# Altium PCB 800U R3N3_LED_V1.1.PcbDoc (part 1 of 2)
Units mm, origin at the board's own origin, x right, y up, seen from the top; angles counter-clockwise.
Board outline 308.48 x 220.22 mm, 4 copper layers (Top Layer, GND, Mid-Layer 2, Bottom Layer); 79 components, 48 nets, 220 pads, 97 vias.
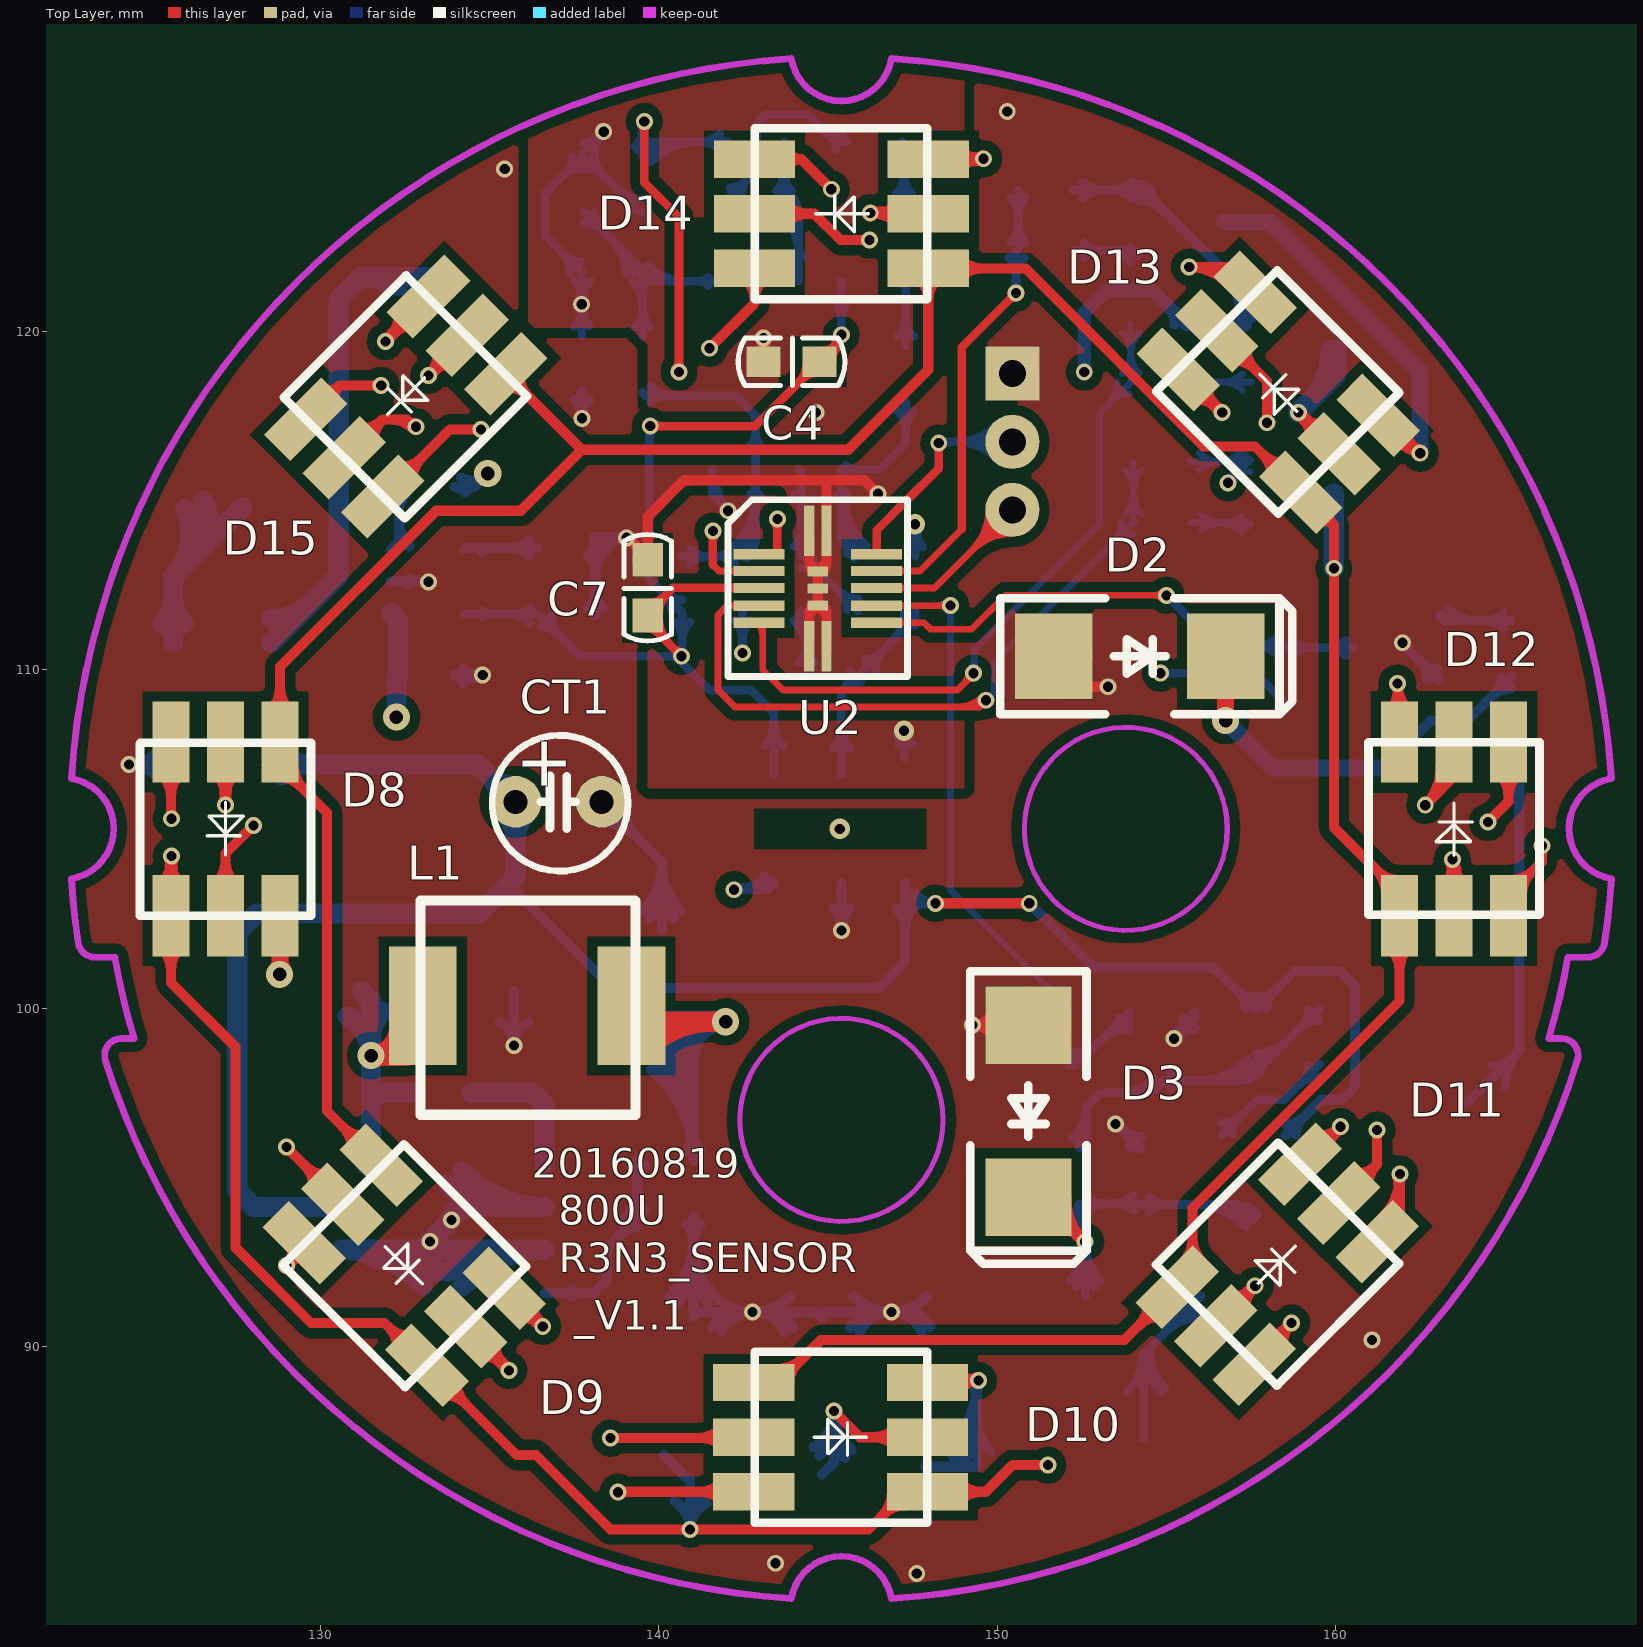
[diagram p0: Top Layer view]
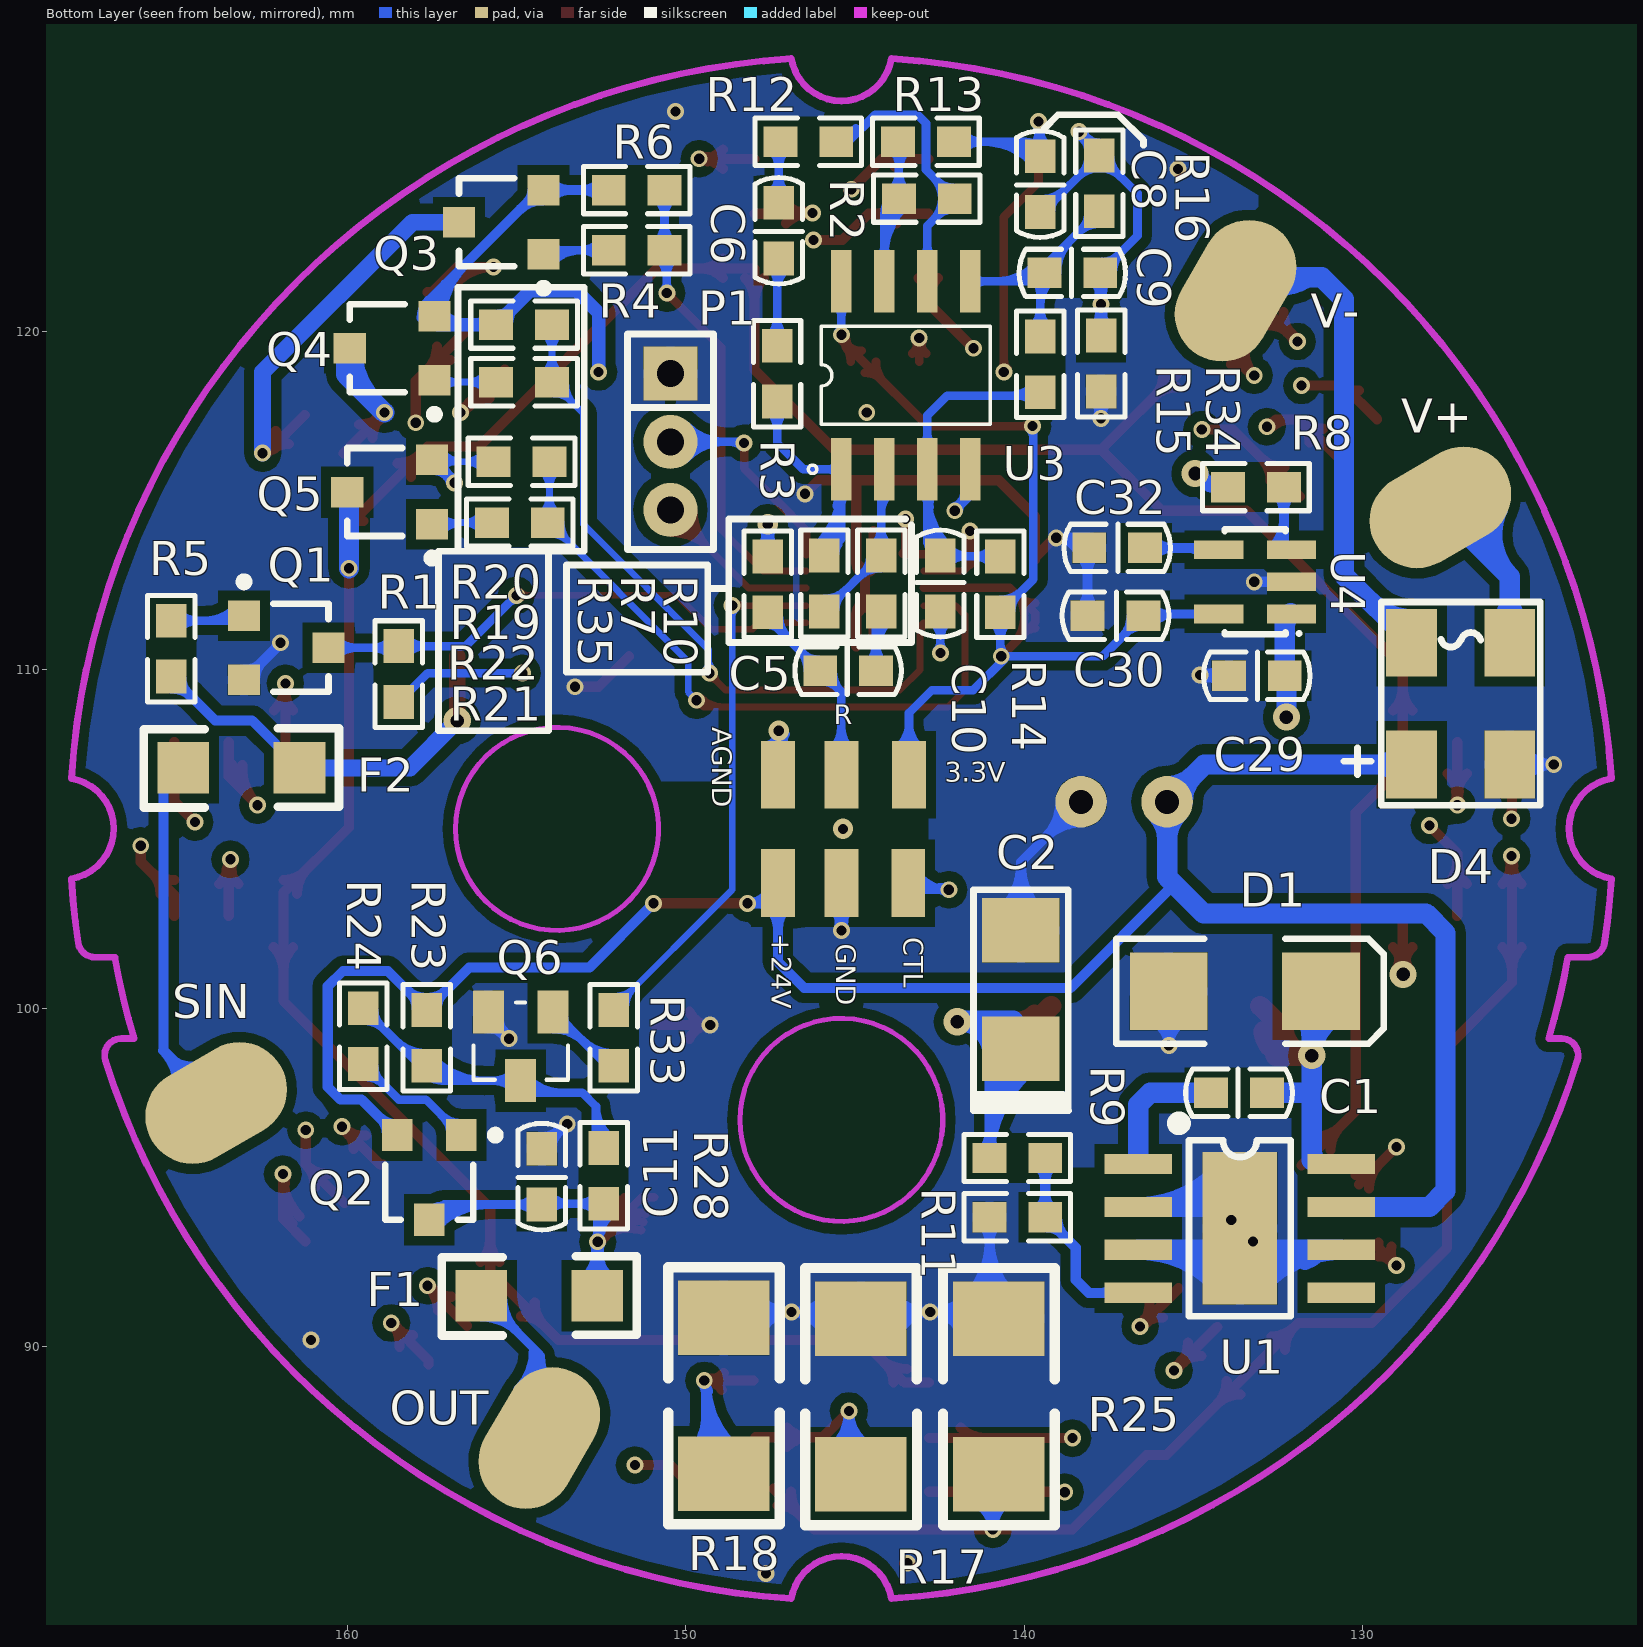
[diagram p1: Bottom Layer view, seen from below]
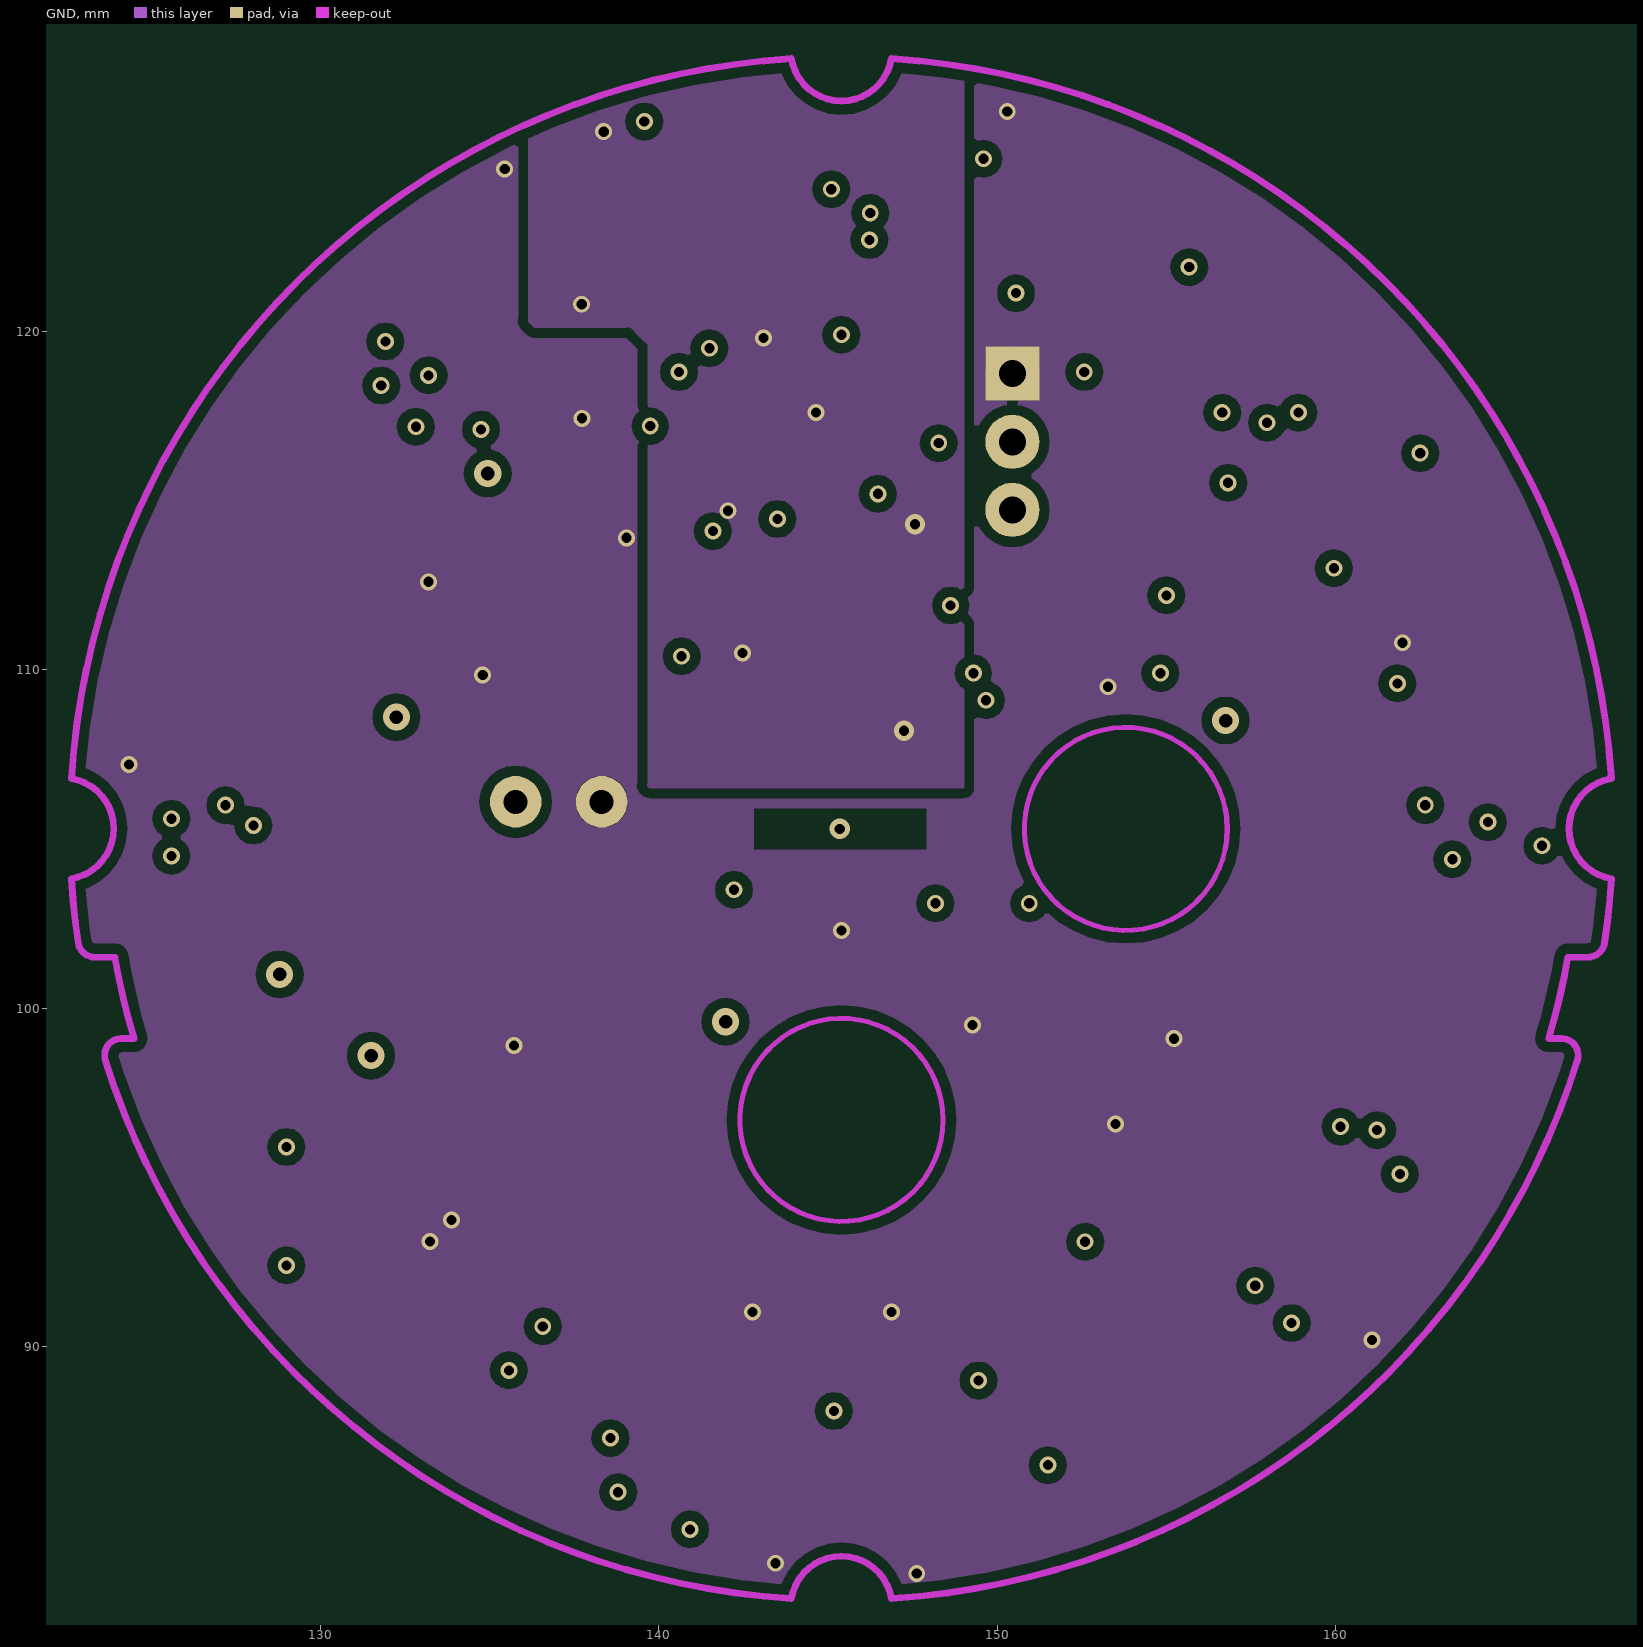
[diagram p2: GND]
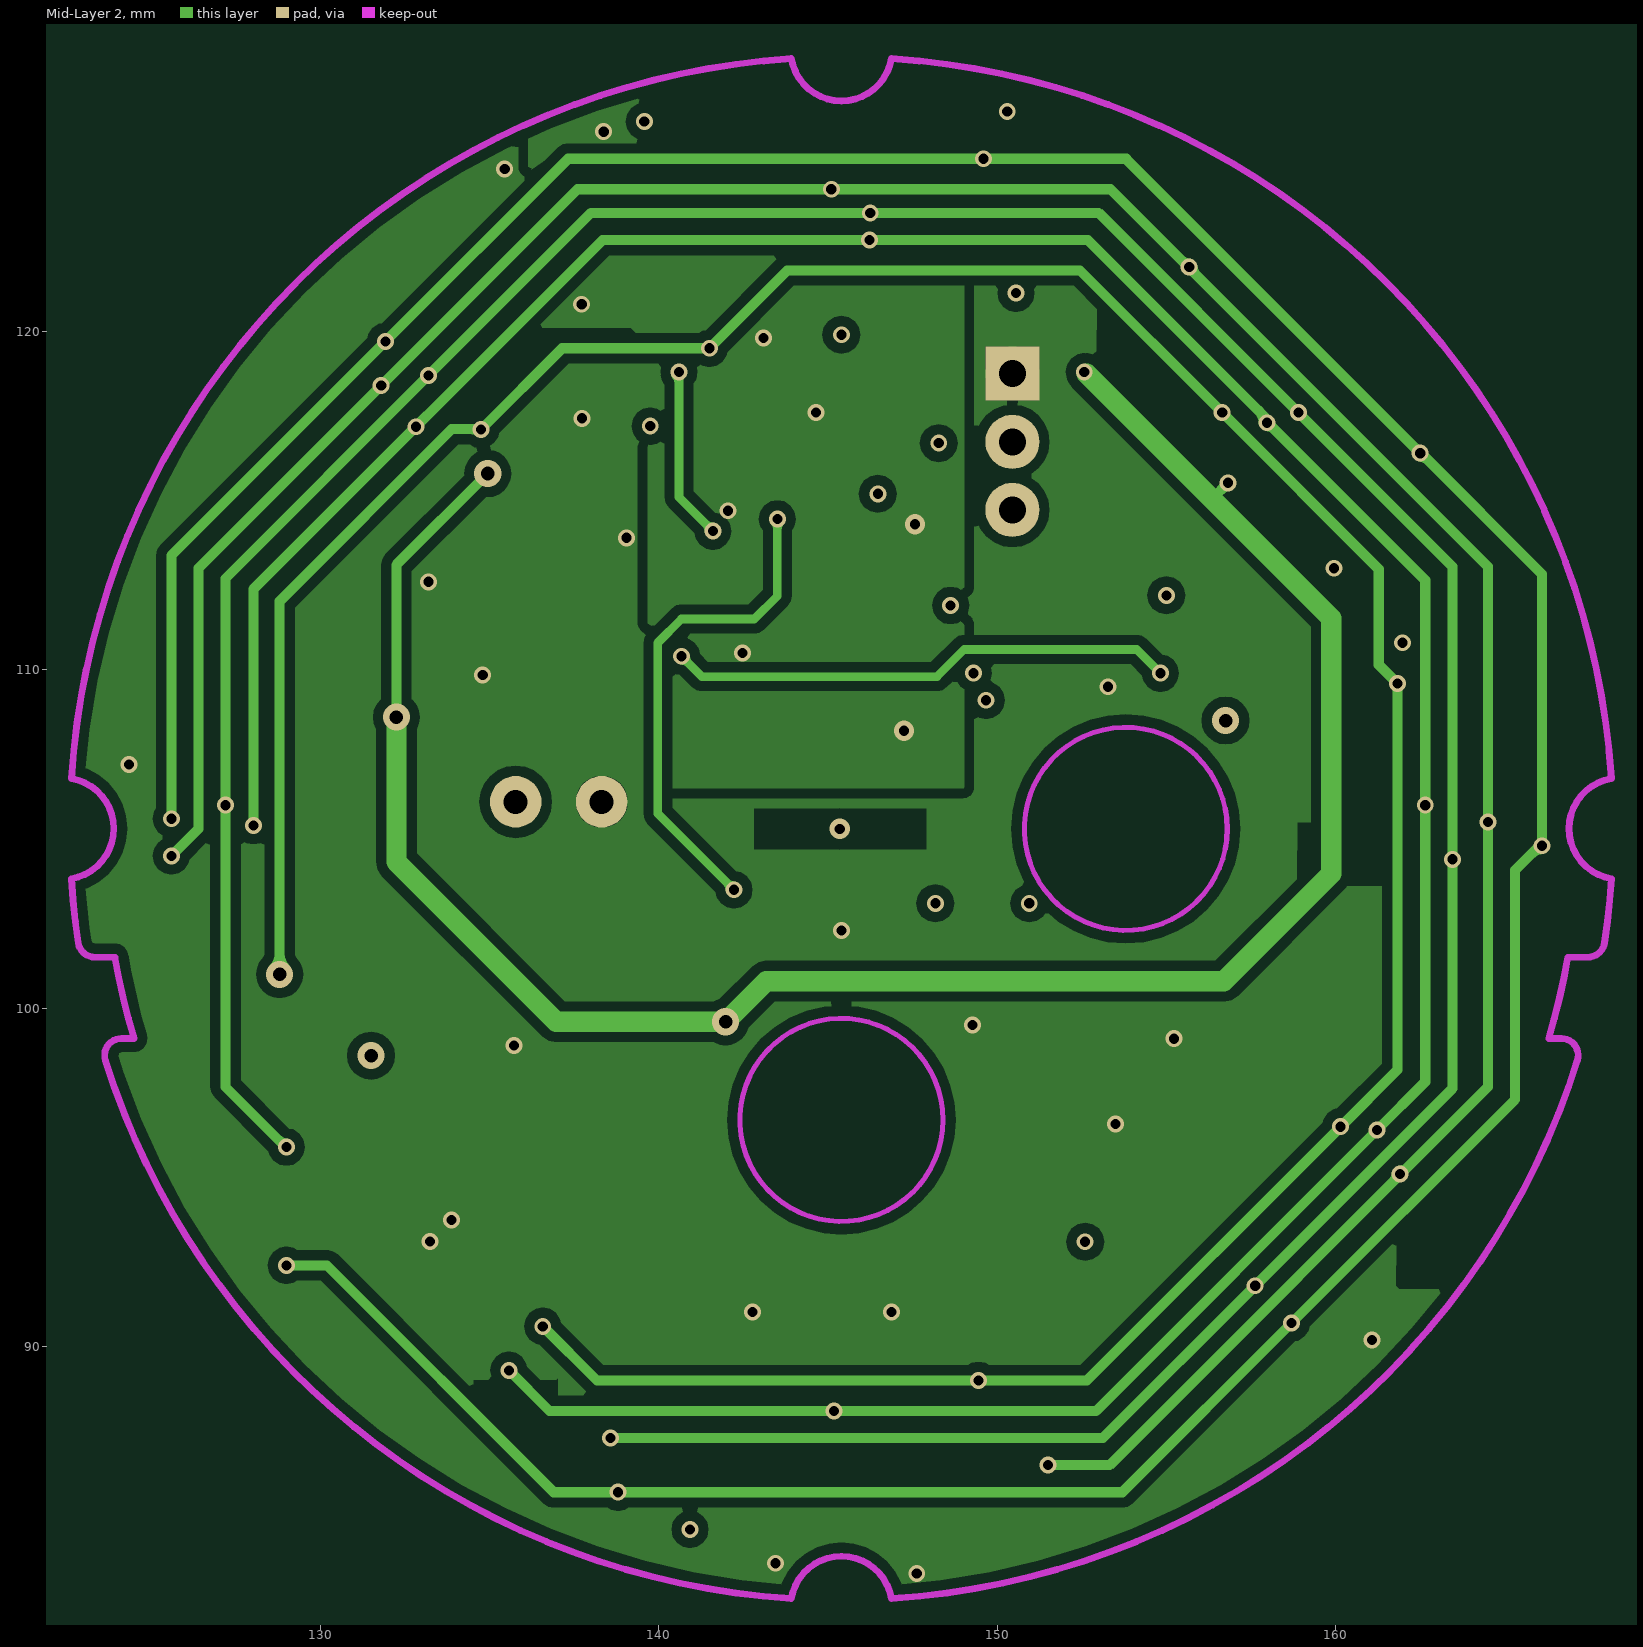
[diagram p3: Mid-Layer 2]

## Layer stack, top to bottom
Top Layer: signal copper 0.0356
Dielectric: core 0.32, FR-4, Dk 4.8
GND: signal copper 0.0356
Dielectric: prepreg 0.32, FR-4, Dk 4.8
Mid-Layer 2: signal copper 0.0356
Dielectric: core 0.32, FR-4, Dk 4.8
Bottom Layer: signal copper 0.0356

## Board outline
-7.366,215.265 301.117,215.265 301.117,-4.191 300.736,-4.572 -6.985,-4.572 -7.366,-4.953

## Design rules (kind name [scope] priority, off if disabled: settings)
Clearance GND [InPolygon] p1: gap=0.3
Clearance Clearance_PAD [ISpad] p2: gap=0.17
Clearance [All] p3: gap=0.25
PolygonConnect [isvia] p1: connectstyle=Direct reliefconductorwidth=0.254 reliefentries=4 polygonreliefangle="90 Angle" airgapwidth=0.254
RoutingVias [All] p1: holewidth=0.3 width=0.5 viastyle="Through Hole" minholewidth=0.3 minwidth=0.5 maxholewidth=0.4 maxwidth=0.8
SilkToSolderMaskClearance SilkscreenOverComponentPads [IsPad] p1: minsilkscreentomaskgap=0.1 clearancetoexposedcopper=TRUE
SolderMaskExpansion [All] p1: expansion=0.102
UnConnectedPin [All] p1:
Width [All] p1: maxlimit=0.6 minlimit=0.2 preferedwidth=0.254 midlayer1_minwidth=0.254 midlayer1_maxwidth=0.254 midlayer2_prefwidth=0.2 minimp=50.000000 maximp=50.000000 favimp=50.000000
27 further rules are at their usual default settings.

## Components (designator, comment, footprint, x,y, rotation, side; value= is the part's Value field where it differs from the comment)
3.3V "" HOLE_SMD#1 143.4,106.9 r0 bottom locked
+24V "" HOLE_SMD#1 147.275,103.7 r180 bottom locked
AGND "" HOLE_SMD#1 147.275,106.9 r180 bottom locked
C1 "10nF" C0603 134.475,97.5 r180 bottom
C2 "钽电容" CT3528 140.075,100.5 r90 bottom
C4 "C106" C0603 144.75,119.1 r180 top
C5 "C104" C0603 146.025,109.975 r180 bottom
C6 "C104" C0603 147.25,122.15 r90 bottom
C7 "105" C0603 139.675,111.6 r90 top
C8 "C104" C0603 139.525,123.525 r90 bottom
C9 "C104" C0603 139.4,121.725 r180 bottom
C10 "C104" C0603 142.475,113.375 r270 bottom
C11 "104" C0603 154.25,94.2 r90 bottom
C29 "4.7uF" C0603 132.3,109.825 r0 bottom
C30 "4.7uF" C0603 136.475,111.6 r0 bottom
C32 "10nF" C0603 136.425,113.6 r0 bottom
CT1 "铝电解电容" RB0.1 135.775,106.1 r0 top
CTL "" HOLE_SMD#1 143.425,103.7 r180 bottom locked (schematic designator LED_CTL)
D1 "SS14" SMB 133.475,100.5 r180 bottom (schematic designator D4)
D2 "TVS36V" HSMA 151.675,110.4 r0 top
D3 "TVS36V" HSMA 150.925,99.5 r270 top
D4 "LX10M" "桥堆 3.8*3.5" 127.1,109 r0 bottom
D8 "5050RGB" 5050RGB 127.2,105.3 r90 top locked
D9 "5050RGB" 5050RGB 132.481,92.4 r135 top locked
D10 "5050RGB" 5050RGB 145.375,87.325 r180 top locked
D11 "5050RGB" 5050RGB 158.275,92.431 r225 top locked
D12 "5050RGB" 5050RGB 163.5,105.3 r270 top locked
D13 "5050RGB" 5050RGB 158.3,118.2 r315 top locked
D14 "5050RGB" 5050RGB 145.4,123.475 r0 top locked
D15 "5050RGB" 5050RGB 132.525,118.075 r45 top locked
F1 "FSMD012-1206-R" 1206 154.325,91.5 r180 bottom
F2 "FSMD012-1206-R" 1206 163.125,107.1 r0 bottom
GND "" HOLE_SMD#2 145.4,103.7 r180 top locked (schematic designator GND1)
L1 "68uH" L-6X6 132.625,100.1 r0 top
OUT "" HOLE_SMD#3 154.325,87.3 r300 bottom
P1 "3P 2.0mm" SIP3 150.45,119.275 r0 bottom
Q1 "MMBT5551" SOT-23#1 161.8,110.65 r270 bottom
Q2 "S8550" SOT-23#1 157.575,95 r0 bottom
Q3 "Si2301CDS" SOT-23#1 155.45,123.225 r90 bottom (schematic designator Q6)
Q4 "Si2301CDS" SOT-23#1 158.675,119.5 r90 bottom
Q5 "Si2301CDS" SOT-23#1 158.75,115.25 r90 bottom
Q6 "贴片三极管" SOT-23#2 154.875,98.9 r0 bottom
R "" HOLE_SMD#1 145.4,106.9 r180 bottom locked (schematic designator LED_R)
R1 "10K" R0603 158.475,110.7 r270 bottom
R2 "" R0603 142.05,123.925 r0 bottom
R3 "" R0603 147.3,117.925 r90 bottom
R4 "" R0603 152.275,122.4 r180 bottom
R5 "10K" R0603 165.2,109.8 r90 bottom
R6 "" R0603 152.275,124.175 r180 bottom
R7 "" R0603 145.9,111.725 r90 bottom
R8 "4K7" R0603 133.975,115.4 r180 bottom
R9 "" R0603 139.375,95.575 r0 bottom
R10 "" R0603 144.225,111.725 r90 bottom
R11 "" R0603 141.025,93.825 r180 bottom
R12 "" R0603 147.2,125.6 r180 bottom
R13 "" R0603 143.725,125.6 r180 bottom
R14 "" R0603 140.7,111.7 r90 bottom
R15 "" R0603 139.525,118.2 r90 bottom
R16 "" R0603 137.775,125.2 r270 bottom
R17 "" 2010 144.825,88.525 r270 bottom
R18 "" 2010 148.875,88.55 r270 bottom
R19 "" R0603 155.6,118.5 r180 bottom
R20 "" R0603 155.6,120.2 r180 bottom
R21 "" R0603 155.725,114.35 r180 bottom
R22 "" R0603 155.675,116.15 r180 bottom
R23 "10K" R0603 157.65,98.3 r90 bottom
R24 "10K" R0603 159.525,100 r270 bottom
R25 "" 2010 140.75,88.525 r270 bottom
R28 "0R" R0603 152.425,95.875 r270 bottom
R33 "2K" R0603 152.125,98.3 r90 bottom
R34 "" R0603 137.725,118.225 r90 bottom
R35 "" R0603 147.575,111.7 r90 bottom
SIN "" HOLE_SMD#3 163.875,97.2 r150 bottom
U1 "LM22674" SO-1.27-9/4.0 136.625,95.4 r270 bottom locked
U2 "C8051F300" QFN-11 144.7,112.4 r0 top locked
U3 "TP2312-SR" SO-8 145.4,115.925 r0 bottom locked (schematic designator U5)
U4 "SP6203/SP6205" SOT-23-5 133.175,112.6 r180 bottom
V+ "" HOLE_SMD#4 127.7,114.8 r195 bottom
V- "" HOLE_SMD#3 133.75,121.2 r300 bottom

## Footprints (in the part's own frame and the unit in brackets; to place one, negate y for a bottom-side part, rotate by r counter-clockwise, add the part's x,y. Pads: shape width x height; smd on the part's side, far side on the other; paste and mask are expansions set on the pad)
1206 [mil]
  rect 60x60 smd: 1(-67.5,0) 2(67.5,0)
  silkscreen extent -114,-46 114,46
2010 [mm]
  rect 2.2x2.7 smd: 1(-2.3,0) 2(2.3,0)
  silkscreen extent -3.8,-1.64 3.8,1.66
5050RGB [mm]
  rect 2.4x1.1 smd: 1(-2.565,1.613) 2(-2.565,0) 3(-2.565,-1.613) 4(2.565,-1.613) 5(2.565,0) 6(2.565,1.613)
  silkscreen extent -2.56,-2.53 2.54,2.53
C0603 [mm]
  rect 1x0.9 smd: 1(0,0) 2(1.65,0)
  silkscreen extent -0.75,-0.7 2.4,0.7
CT3528 [mil]
  rect 75x90 smd: 1(-66.85,0.75) 2(70.94,0.75)
  silkscreen extent -139,-54 118,56
HOLE_SMD#1 [mm]
  rect 1x2 smd: 1(0,0)
HOLE_SMD#2 [mm]
  rect 1x2 smd far side: 1(0,0)
HOLE_SMD#3 [mm]
  oval 4.4x2.8 smd: 1(0,0)
HOLE_SMD#4 [mm]
  oval 4.4x2.8 smd rot 45: 1(0,0)
HSMA [mil]
  rect 90x100 smd: 1(0,0) 2(200,0)
  silkscreen extent -62,-68 278,68
L-6X6 [mm]
  rect 2x3.5 smd: 1(0.403,-0.033) 2(6.571,-0.033)
  silkscreen extent 0.33,-3.25 6.69,3.08
QFN-11 [mm]
  rect 1.5x0.305 smd: 1(-1.737,1.018) 2(-1.737,0.518) 3(-1.737,0.018) 4(-1.737,-0.507) 5(-1.737,-1.007) 6(1.737,-1.007) 7(1.737,-0.507) 8(1.737,0.018) 9(1.737,0.518) 10(1.737,1.018)
  rect 0.305x1.5 smd: 11(-0.248,-1.705) 11(-0.248,1.705) 11(0.26,-1.705) 11(0.26,1.705)
  rect 0.6x0.3 smd: 11(0,-0.5) 11(0,0) 11(0,0.5)
  silkscreen extent -2.65,-2.6 2.65,2.63
R0603 [mm]
  rect 1x0.9 smd: 1(0,0) 2(1.65,0)
  silkscreen extent -0.75,-0.7 2.4,0.7
RB0.1 [mil]
  round 60 hole 28: 1(0,0) 2(100,0)
  silkscreen extent -27,-81 131,77
SIP3 [mm]
  rect 1.6x1.6 hole 0.8: 1(0,0.525)
  round 1.6 hole 0.8: 2(0,2.54) 3(0,4.55)
  silkscreen extent -1.28,-0.65 1.27,5.72
SMB [mm] "DO-214-AA/SMB; 2 C-Bend Leads; Body 5.3 x 3.6 mm, inc. leads (LxW)"
  rect 2.3x2.3 smd: 1(-2.25,0) 2(2.25,0)
  silkscreen extent -3.8,-1.55 4.1,1.55
SO-1.27-9/4.0 [mm]
  rect 0.6x2 smd: 1(0,0) 2(1.27,0) 3(2.54,0) 4(3.81,0) 5(3.81,6) 6(2.54,6) 7(1.27,6) 8(0,6)
  rect 4.5x2.2 smd: 9(1.905,3)
  silkscreen extent -1.35,1.05 4.5,4.5
SO-8 [mm]
  rect 0.6x1.85 smd: 1(0,0) 2(-1.27,0) 3(-2.54,0) 4(-3.81,0) 5(-3.81,-5.55) 6(-2.54,-5.55) 7(-1.27,-5.55) 8(0,-5.55)
  silkscreen extent -4.41,-4.23 0.98,0.12
SOT-23#1 [mm] "SOT-23; 3 Leads; Body 3.0 x 2."
  rect 0.9x0.95 smd: 1(-0.95,-1.25) 2(0.95,-1.25) 3(0,1.25)
  silkscreen extent -2.07,-1.38 1.3,1.25
SOT-23#2 [mm]
  rect 0.914x1.27 smd: 1(-0.953,-0.991) 2(0.953,-0.991) 3(0,1.041)
  silkscreen extent -1.4,-1.27 1.4,1.02
SOT-23-5 [mm]
  rect 1.45x0.55 smd: 1(1.075,-0.95) 2(1.075,0) 3(1.075,0.95) 4(-1.075,0.95) 5(-1.075,-0.95)
  silkscreen extent -0.9,-1.57 1.35,1.55
"桥堆 3.8*3.5" [mm]
  rect 1.5x2 smd: 1(1.45,1.8) 2(1.45,-1.8) 3(-1.45,-1.8) 4(-1.45,1.8)
  silkscreen extent -2.35,-3 3.45,3

## Part data
3.3V +24V AGND CTL GND OUT R SIN V+ V-: library part 焊盘
C1 C4 C5 C6 C8 C9 C10: library part Cap, "Capacitor"
C2 CT1: library part "Cap Pol1", "Polarized Capacitor (Radial)"
C7 C11: library part Cap, "贴片电容"
C29 C30 C32: library part CAP, "Capacitor"
D1: library part SMBJ6.0CA
D2 D3: library part "D Schottky", "贴片TVS"
D4: library part Bridge2, "贴片桥堆"
D8 D9 D10 D11 D12 D13 D14 D15: "RBG发光管"
F1 F2: library part "Fuse 2", "Fuse"
L1: library part 电感
P1: library part MHDR1X3, "插座"
Q1: library part NPN, "贴片NPN三极管"
Q2: "贴片PNP三极管"
Q3 Q4 Q5: library part P-MOSFET, "贴片MOS管"
Q6: library part NPN, "NPN三极管"
R1 R4 R5 R6 R17 R18 R19 R20 R21 R22 R23 R24 R25 R28 R33: library part "Res Semi", "贴片电阻"
R2 R3 R7 R9 R10 R11 R12 R13 R14 R15 R16 R34 R35: library part "Res Semi", "Semiconductor Resistor"
R8: library part Res1, "Resistor"
U1: library part 2674
U2: library part PIC16C505, "贴片芯片"
U3: library part LM833D, "Dual Low Noise, Audio Amplifier"

## Via types
v1: diameter 0.5, hole 0.3, Top Layer to Bottom Layer, 88 vias
v2: diameter 0.8, hole 0.4, Top Layer to Bottom Layer, 6 vias
v3: diameter 0.6, hole 0.3, Top Layer to Bottom Layer, 3 vias

## Nets (pads, with @x,y where several pads share a name; then routed paths per layer and width w, separated by ;. In a path a pad name is that pad's centre, name@x,y a point inside that pad or via, vN(x,y) a via of type N, cw(c..) or ccw(c..) an arc to the next point about the centre after c; other vN are vias at no path point)
3.3V: 3.3V.1 C4.1 C7.1 C30.1 R1.2 R14.1 U2.3 U3.8 U4.5 | length 68.1
  Top Layer w0.25: 140.418,112.418 U2.3@142.963,112.418
  Top Layer w0.254: C7.1@139.675,111.227 cw(c139.675,110.809) C7.1@139.97,111.105 ; C7.1@139.675,111.973 ccw(c139.675,112.692) 140.184,112.184 ; v1@139.775,117.2 142.85,117.2 C4.1@144.75,119.1 145.4,119.75 v1(145.4,119.9) ; v1@139.837,117.113 cw(c140.047,116.903) 140.047,117.2 cw(c140.047,117.497) v1@139.837,117.287 ; C7.1@139.998,111.55 ccw(c141.14,111.55) 140.332,110.743 ; C7.1@139.998,111.65 cw(c140.838,111.65) 140.244,112.244 ; 140.418,112.418 139.675,111.675 C7.1@139.675,111.6 139.675,111.4 v1(140.675,110.4) ; v1@140.552,110.4 ccw(c140.255,110.4) 140.465,110.61 ccw(c140.675,110.82) v1@140.675,110.523 ; 144.113,118.463 ccw(c143.477,119.1) C4.1@144.377,119.1 ; 144.234,118.584 cw(c144.7,118.118) C4.1@144.7,118.777 ; C4.1@144.8,119.423 ccw(c144.8,120.082) 145.266,119.616 ; C4.1@145.084,119.434 ccw(c144.618,119.9) v1@145.277,119.9 ; C4.1@145.123,119.1 cw(c146.023,119.1) v1@145.387,119.737 ; C4.1@145.228,119.461 ccw(c144.763,119.729) v1@145.281,119.868
  Mid-Layer 2 w0.254: v1@140.675,110.277 cw(c140.675,109.98) 140.885,110.19 cw(c141.095,110.4) v1@140.798,110.4 ; v1(140.675,110.4) 141.275,109.8 148.225,109.8 149.025,110.6 154.125,110.6 v1(154.825,109.9)
  Bottom Layer w0.254: U4.5@134.25,111.65 136.425,111.65 C30.1@136.475,111.6 137.675,110.4 v1(140.675,110.4) ; U4.5@134.805,111.545 cw(c135.057,111.293) 135.057,111.65 cw(c135.057,112.007) U4.5@134.805,111.755 ; 135.524,111.65 cw(c135.524,110.699) C30.1@136.197,111.372 ; 135.766,111.65 ccw(c135.766,112.259) C30.1@136.197,111.828 ; C30.1@136.525,111.277 cw(c136.525,110.618) 136.991,111.084 ; C30.1@136.848,111.6 ccw(c137.748,111.6) 137.112,110.963 ; v1@139.675,117.2 139.725,117.15 139.725,112.675 R14.1@140.7,111.7 v1@140.7,110.313 ; 139.725,116.843 cw(c140.107,116.843) v1@139.837,117.113 ; 140.063,112.337 ccw(c140.7,112.973) R14.1@140.7,112.073 ; 140.184,112.216 cw(c139.718,111.75) R14.1@140.377,111.75 ; R14.1@140.472,111.422 cw(c139.92,110.87) 140.7,110.87 cw(c141.48,110.87) R14.1@140.928,111.422 ; v1@140.588,110.313 141.501,109.4 142.725,109.4 143.4,108.725 3.3V.1@143.4,106.9 ; v1@140.588,110.487 ccw(c140.318,110.757) 140.7,110.757 ; 3.3V.1@143.136,107.763 ccw(c142.5,108.4) 143.4,108.4 ccw(c144.3,108.4) 3.3V.1@143.664,107.763 ; U3.8@145.278,120.728 cw(c144.982,120.432) 145.4,120.432 cw(c145.818,120.432) U3.8@145.522,120.728 ; v1@145.313,119.987 ccw(c145.103,120.197) 145.4,120.197 ccw(c145.697,120.197) v1@145.487,119.987 ; v1(145.4,119.9) U3.8@145.4,121.475 ; v1(154.825,109.9) 157.625,109.9 R1.2@158.475,109.05
  other v1: 139.75,117.2
+24V: +24V.1 CT1.1 D4.1 Q2.2 R23.2 U1.7 | length 77.6
  Top Layer w0.3: v1(148.175,103.1) v1(150.95,103.1)
  Bottom Layer w0.3: 135.563,103.663 138.625,100.6 146.5,100.6 147.275,101.375 +24V.1@147.275,103.15 ; +24V.1@147.028,102.953 cw(c146.43,102.355) 147.275,102.355 cw(c148.12,102.355) 147.522,102.953 cw(c147.879,102.596) 147.879,103.1 ; +24V.1@147.275,103.7 +24V.1@147.275,103.15 ; +24V.1@147.555,103.41 ccw(c148.175,103.875) v1(148.175,103.1) 147.325,103.1 +24V.1@147.275,103.15 ; v1(150.95,103.1) 152.85,101.2 156.4,101.2 R23.2@157.65,99.95 158.8,101.1 160.125,101.1 160.575,100.65 160.575,97.675 160.2,97.3 159.575,97.3 Q2.2@158.525,96.25 ; 157.053,100.547 ccw(c157.65,101.145) 157.65,100.3 ccw(c157.65,101.145) 158.247,100.547 ; 157.173,100.427 cw(c156.746,100) R23.2@157.35,100 ; R23.2@157.95,100 cw(c158.554,100) 158.127,100.427 ; Q2.2@158.525,96.575 ccw(c158.525,97.36) 159.08,96.805 ; Q2.2@158.825,96.275 cw(c159.489,96.275) 159.019,96.744
  Bottom Layer w0.6: D4.1@128.55,107.2 134.675,107.2 CT1.1@135.775,106.1 135.775,103.875 ; D4.1@128.868,106.882 cw(c129.636,106.114) 129.636,107.2 cw(c129.636,108.286) D4.1@128.868,107.518 ; U1.7@130.625,94.13 128.02,94.13 127.55,94.6 127.55,102.225 128.125,102.8 134.7,102.8 135.775,103.875 ; CT1.1@135.313,106.1 ccw(c134.198,106.1) 134.986,106.889 ccw(c135.775,107.677) CT1.1@135.775,106.562 ; CT1.1@135.448,105.773 cw(c134.66,104.985) 135.775,104.985 cw(c136.89,104.985) CT1.1@136.102,105.773 ; 135.563,103.663 135.775,103.875
ADCIN1: C8.2 R13.2 U2.2 | length 27.9
  Top Layer w0.2: 141.6,113.1 141.782,112.918 U2.2@142.963,112.918
  Top Layer w0.254: v1@139.488,126.113 cw(c139.278,125.903) 139.575,125.903 cw(c139.872,125.903) v1@139.662,126.113 ; v1(139.575,126.2) 139.575,124.4 140.6,123.375 v1(140.6,118.8) ; v1@140.488,118.887 ccw(c140.218,119.157) 140.6,119.157 ; v1@141.513,114.013 cw(c141.303,113.803) 141.6,113.803 cw(c141.897,113.803) v1@141.687,114.013 ; 141.6,113.1 v1(141.6,114.1)
  Mid-Layer 2 w0.254: v1@140.488,118.713 cw(c140.218,118.443) 140.6,118.443 ; v1(140.6,118.8) 140.6,115.1 v1(141.6,114.1) ; v1@141.477,114.1 ccw(c141.18,114.1) 141.39,114.31 ccw(c141.6,114.52) v1@141.6,114.223
  Bottom Layer w0.254: C8.2@139.297,125.453 ccw(c138.625,126.125) v1@139.575,126.125 ; C8.2@139.394,125.356 cw(c139.984,124.766) 139.984,125.6 ; v1@139.468,126.138 cw(c139.154,125.957) 139.505,125.863 ; v1@139.488,126.113 cw(c139.278,125.903) 139.575,125.903 cw(c139.872,125.903) v1@139.662,126.113 ; C8.2@139.525,125.175 C8.2@139.575,125.225 ; 139.529,125.953 cw(c139.752,125.893) v1@139.636,126.093 ; C8.2@139.574,125.176 cw(c140.597,124.153) 140.597,125.6 ; 139.575,125.884 ccw(c140.184,125.884) C8.2@139.753,125.453 ; v1(139.575,126.2) C8.2@139.575,125.225 ; C8.2@139.753,124.997 cw(c141.21,123.54) 141.21,125.6 ; R13.2@141.797,125.372 ccw(c141.245,124.82) 141.245,125.6 ccw(c141.245,126.38) R13.2@141.797,125.828 ; R13.2@142.075,125.6 139.95,125.6 C8.2@139.575,125.225
AGND: AGND.1 C4.2 C8.1 C9.2 C10.2 R16.1 R34.2 R35.2 U3.4 | length 36.2
  Top Layer w0.254: C4.2@142.89,119.346 ccw(c142.503,119.8) v1(143.1,119.8) ; v1@142.993,119.739 cw(c142.736,119.59) 143.023,119.513 cw(c143.31,119.436) v1@143.161,119.693 ; v1@143.013,119.713 cw(c142.803,119.503) 143.1,119.503 cw(c143.397,119.503) v1@143.187,119.713 ; v1@143.039,119.693 cw(c142.89,119.436) 143.177,119.513 cw(c143.464,119.59) v1@143.207,119.738 ; C4.2@143.1,119.1 v1(143.1,119.8) ; C4.2@143.31,119.346 cw(c143.697,119.8) v1(143.1,119.8)
  Bottom Layer w0.254: 137.113,122.362 cw(c136.477,121.725) C9.2@137.377,121.725 ; 137.138,124.563 cw(c137.775,123.927) 137.775,124.827 cw(c137.775,123.927) 138.412,124.563 ; 137.234,122.241 ccw(c137.7,122.707) C9.2@137.7,122.048 ; 137.259,124.684 ccw(c136.793,125.15) R16.1@137.452,125.15 ; R34.2@137.497,120.153 ccw(c136.945,120.705) 137.725,120.705 ccw(c138.505,120.705) R34.2@137.953,120.153 ; C9.2@137.522,121.497 cw(c137.031,121.006) v1@137.725,121.006 ; v1@137.618,120.739 cw(c137.288,120.548) 137.657,120.449 ; v1@137.618,120.862 ccw(c137.204,121.101) 137.666,121.225 ; v1@137.638,120.713 cw(c137.428,120.503) 137.725,120.503 cw(c138.022,120.503) v1@137.812,120.713 ; v1@137.638,120.887 ccw(c137.428,121.097) 137.725,121.097 ccw(c138.022,121.097) v1@137.812,120.887 ; R34.2@137.725,119.875 v1(137.725,120.8) 137.725,121.7 C9.2@137.75,121.725 136.65,122.825 136.65,124.075 R16.1@137.775,125.2 ; v1@137.725,120.885 cw(c138.59,120.885) C9.2@137.978,121.497 ; R16.1@137.775,125.573 ccw(c137.775,126.232) v1@138.241,125.766 ; 137.793,120.449 cw(c138.162,120.548) v1@137.832,120.738 ; 137.794,121.144 ccw(c138.154,121.047) v1@137.832,120.861 ; R16.1@138.04,125.65 ccw(c137.808,126.052) v1@138.256,125.932 ; R16.1@138.098,125.15 ccw(c138.757,125.15) 138.291,124.684 ; R16.1@138.098,125.25 cw(c138.998,125.25) v1@138.362,125.887 ; R16.1@138.216,125.635 cw(c138.488,125.478) v1@138.407,125.781 ; 138.228,125.655 ccw(c137.985,125.796) v1@138.256,125.868 ; v1@138.252,125.9 cw(c137.955,125.9) 138.165,125.69 cw(c138.375,125.48) v1@138.375,125.777 ; v1(138.375,125.9) 137.775,125.3 R16.1@137.775,125.2 ; 138.76,124.215 ccw(c139.525,124.98) C8.1@139.525,123.898 ; 139.062,123.913 cw(c138.724,123.575) C8.1@139.202,123.575 ; C8.1@139.525,123.525 139.45,123.525 R16.1@137.775,125.2 ; U3.4@141.59,115.925 141.59,115.16 v1(142.05,114.7) ; U3.4@141.763,115.3 ccw(c142.519,115.3) v1@141.984,114.766 ; 141.852,114.995 ccw(c142.18,115.185) v1@142.082,114.819 ; v1@141.927,114.7 ccw(c141.63,114.7) 141.84,114.91 ccw(c142.05,115.12) v1@142.05,114.823 ; C10.2@142.247,111.447 cw(c141.695,110.895) 142.475,110.895 cw(c143.255,110.895) C10.2@142.703,111.447 ; v1@142.388,110.587 ccw(c142.178,110.797) 142.475,110.797 ccw(c142.772,110.797) v1@142.562,110.587 ; v1(142.475,110.5) C10.2@142.475,111.725 ; v3@147.05,108.1 cw(c146.688,107.891) AGND.1@147.092,107.783 ; AGND.1@147.25,107.4 v3@147.25,108.3 ; v3@147.305,108.054 ccw(c147.709,108.162) AGND.1@147.5,107.8 ; R35.2@147.347,113.628 ccw(c146.795,114.18) 147.575,114.18 ccw(c148.355,114.18) R35.2@147.803,113.628 ; v3@147.429,114.208 cw(c147.04,113.961) R35.2@147.484,113.842 ; v3@147.453,114.178 cw(c147.157,113.882) 147.575,113.882 cw(c147.993,113.882) v3@147.697,114.178 ; v3@147.489,114.15 cw(c147.333,113.88) 147.634,113.961 ; 147.516,113.961 cw(c147.817,113.88) v3@147.661,114.15 ; R35.2@147.575,113.35 v3(147.575,114.3) ; R35.2@147.666,113.842 cw(c148.11,113.961) v3@147.721,114.208
  other v1: 144.65,117.6
  other v3: 147.25,108.2
B-: D8.3 D9.3 D10.3 D11.3 D12.3 D13.3 D14.3 D15.3 R18.2 | length 141
  Top Layer w0.3: D8.3@128.53,101.802 cw(c127.847,101.119) 128.813,101.119 cw(c129.779,101.119) D8.3@129.096,101.802 ; v2@128.615,101.168 ccw(c128.329,101.429) 128.703,101.529 ; v2@128.623,101.177 ccw(c128.165,101.635) D8.3@128.813,101.635 ; v2@128.675,101.217 ccw(c128.404,101.685) D8.3@128.927,101.545 ; 128.713,101.493 ccw(c129.153,101.611) v2@128.925,101.217 ; v2(128.8,101) 128.813,101.013 D8.3@128.813,102.735 ; D8.3@128.813,101.572 ccw(c129.372,101.572) v2@128.977,101.177 ; D8.3@128.934,101.571 ccw(c129.441,101.435) v2@129.007,101.14 ; D15.3@131.851,115.12 133.831,117.1 v1(134.75,117.1) ; D15.3@132.311,115.98 ccw(c132.311,116.946) 132.994,116.263 ccw(c133.677,115.58) D15.3@132.711,115.58 ; D9.3@135.436,91.726 v1@136.562,90.6 ; D9.3@135.902,90.867 cw(c135.917,89.955) v1@136.562,90.6 ; D9.3@136.295,91.26 ccw(c137.207,91.245) v1@136.562,90.6 ; 136.349,90.723 ccw(c136.481,90.951) v1@136.549,90.697 ; 136.382,90.78 ccw(c136.575,90.973) v1@136.575,90.7 ; 136.431,90.827 ccw(c136.673,90.967) v1@136.601,90.697 ; v1(136.575,90.6) v1@136.562,90.6 ; v1(141.5,119.5) 142.835,120.835 D14.3@142.835,121.862 ; D14.3@142.552,121.579 cw(c141.869,120.896) 142.835,120.896 cw(c143.8,120.896) D14.3@143.117,121.579 ; D10.3@148.003,89 v1(149.45,89) ; D10.3@148.873,89.221 ccw(c149.406,89.754) v1@149.406,89 ; D10.3@148.924,88.717 cw(c149.45,88.37) v1(149.45,89) ; 149.187,89.059 ccw(c149.26,89.329) v1@149.4,89.087 ; v1@149.388,88.938 v1(149.45,89) ; D13.3@155.345,118.874 156.619,117.6 v1(156.65,117.6) ; D13.3@155.805,118.014 cw(c155.805,117.048) 156.488,117.731 cw(c157.171,118.414) D13.3@156.205,118.414 ; 156.374,117.928 ccw(c156.804,118.176) v1@156.676,117.697 ; 156.389,117.788 cw(c156.213,117.483) v1@156.553,117.574 ; 156.426,117.793 ccw(c156.65,118.016) v1@156.65,117.7 ; D11.3@158.949,95.386 159.036,95.386 v1(160.15,96.5) cw(c159.523,97.127) D11.3@159.444,96.244 ; D11.3@159.808,95.845 cw(c160.564,95.845) v1@160.029,96.379 ; 159.938,96.221 cw(c160.277,96.025) v1@160.176,96.403 ; D12.3@161.604,108.798 ccw(c161.071,109.331) 161.825,109.331 ; D12.3@161.825,107.928 v1(161.825,109.6) ; v1@161.887,109.538 v1(161.825,109.6) ; D12.3@162.164,108.804 cw(c162.929,109.6) v1(161.825,109.6)
  Mid-Layer 2 w0.3: v2@128.623,101.177 ccw(c128.196,101.604) 128.8,101.604 ccw(c129.404,101.604) v2@128.977,101.177 ; v2(128.8,101) 128.8,112.025 133.887,117.112 v1@134.612,117.112 ; 134.478,117.112 cw(c134.478,116.828) v1@134.679,117.029 ; v1(134.75,117.1) 137.15,119.5 v1(141.5,119.5) 143.8,121.8 152.45,121.8 v1(156.65,117.6) 161.275,112.975 161.275,110.15 v1(161.825,109.6) 161.825,98.175 v1(160.15,96.5) 152.65,89 v1(149.45,89) 138.175,89 v1(136.575,90.6)
  Bottom Layer w0.3: R18.2@147.875,86.45 149.4,86.45 v1@149.4,88.95 ; R18.2@148.499,86.965 ccw(c146.762,88.95) v1@149.4,88.95 ; R18.2@148.697,86.739 ccw(c147.341,88.289) 149.4,88.289 ; R18.2@148.895,86.513 ccw(c147.92,87.627) 149.4,87.627 ; 149.343,88.681 cw(c149.707,88.603) v1@149.504,88.916 ; 149.4,87.88 ccw(c150.755,87.88) R18.2@149.797,86.922 ; 149.4,88.638 cw(c149.812,88.638) v1@149.521,88.929 ; v1(149.45,89) v1@149.4,88.95
BLUE: D8.4 D9.4 D10.4 D11.4 D12.4 D13.4 D14.4 D15.4 Q5.3 | length 121.2
  Top Layer w0.3: D8.4@128.53,108.798 ccw(c127.847,109.481) 128.813,109.481 ccw(c129.779,109.481) D8.4@129.096,108.798 ; D8.4@128.813,106.815 cw(c128.813,105.978) 129.405,106.57 ; D8.4@129.213,107.215 ccw(c130.307,107.215) 129.533,106.442 ; D9.4@130.948,95.814 ccw(c129.982,95.814) 130.665,96.497 ccw(c131.348,97.18) D9.4@131.348,96.214 ; D9.4@131.808,95.355 130.2,96.962 130.2,105.775 128.813,107.162 D8.4@128.813,107.865 128.813,110.088 133.425,114.7 135.925,114.7 137.737,116.513 ; D15.4@135.48,118.349 cw(c135.48,117.383) 136.162,118.066 cw(c136.845,118.749) D15.4@135.88,118.749 ; D15.4@135.48,118.749 137.728,116.5 145.6,116.5 147.965,118.865 D14.4@147.965,121.862 150.838,121.862 156.1,116.6 157.619,116.6 D13.4@158.974,115.245 159.95,114.269 ; D10.4@142.81,88.938 143.538,88.938 144.8,90.2 153.763,90.2 D11.4@155.32,91.758 155.775,92.212 155.775,94.1 161.887,100.212 D12.4@161.887,102.735 161.887,103.413 159.95,105.35 v1(159.95,113) 159.95,114.269 ; D10.4@143.46,89.338 ccw(c143.46,90.493) 144.276,89.676 ; D10.4@143.86,88.938 cw(c144.636,88.938) 144.087,89.487 ; D14.4@147.683,121.579 cw(c147,120.896) 147.965,120.896 cw(c148.931,120.896) D14.4@148.248,121.579 ; D14.4@148.898,121.579 cw(c149.581,120.896) 149.581,121.862 cw(c149.581,122.828) D14.4@148.898,122.145 ; D11.4@154.461,91.298 cw(c153.495,91.298) 154.178,90.615 cw(c154.861,89.932) D11.4@154.861,90.898 ; D11.4@155.497,92.5 ccw(c154.827,93.17) 155.775,93.17 ; 155.775,93.195 ccw(c156.758,93.195) D11.4@156.063,92.5 ; D13.4@158.114,115.705 ccw(c157.148,115.705) 157.831,116.388 ccw(c158.514,117.071) D13.4@158.514,116.105 ; D13.4@159.519,114.395 cw(c159.619,113.938) 159.95,114.269 ; D13.4@159.824,114.7 ccw(c160.281,114.6) 159.95,114.269 ; 161.184,104.116 cw(c160.453,103.385) D12.4@161.487,103.385 ; 161.253,104.047 ccw(c161.887,104.682) D12.4@161.887,103.785 ; D12.4@161.604,101.802 cw(c160.921,101.119) 161.887,101.119 cw(c162.853,101.119) D12.4@162.17,101.802
  Bottom Layer w0.3: v1(159.95,113) v1@160,113.05
  Bottom Layer w0.6: v1(159.95,113) Q5.3@159.95,115.2
G-: D8.2 D9.2 D10.2 D11.2 D12.2 D13.2 D14.2 D15.2 R17.2 | length 140.7
  Top Layer w0.3: D8.2@126.917,103.667 ccw(c126.234,104.35) 127.2,104.35 ccw(c128.166,104.35) D8.2@127.483,103.667 ; D8.2@127.2,102.735 127.2,104.575 v1(128.025,105.4) ; D15.2@130.711,116.261 131.85,117.4 ; D15.2@131.172,117.121 ccw(c131.176,118.074) 131.85,117.4 ; D15.2@131.571,116.722 cw(c132.524,116.726) 131.85,117.4 ; 132.056,117.4 cw(c132.056,116.412) v1@132.754,117.111 ; 132.558,117.392 ccw(c132.825,117.659) v1@132.825,117.281 ; v1@132.85,117.1 132.55,117.4 131.85,117.4 ; D9.2@134.295,90.586 135.575,89.306 v1(135.575,89.3) ; D9.2@134.755,89.726 cw(c134.755,88.761) 135.438,89.444 cw(c136.12,90.126) D9.2@135.155,90.126 ; 135.278,89.536 cw(c135.062,89.163) v1@135.478,89.274 ; 135.356,89.584 ccw(c135.705,89.786) v1@135.601,89.397 ; 135.4,89.481 cw(c135.219,89.3) v1@135.475,89.3 ; D14.2@142.835,123.475 144.6,123.475 145.375,122.7 v1(146.225,122.7) ; D14.2@143.767,123.192 cw(c144.45,122.509) 144.45,123.475 cw(c144.45,124.441) D14.2@143.767,123.758 ; v1(145.175,88.1) 145.95,87.325 D10.2@147.94,87.325 ; D10.2@147.008,87.042 ccw(c146.325,86.359) 146.325,87.325 ccw(c146.325,88.291) D10.2@147.008,87.608 ; D13.2@156.486,120.014 157.975,118.525 v1(157.975,117.3) ; D13.2@156.946,119.154 cw(c156.946,118.189) 157.628,118.872 cw(c158.311,119.554) D13.2@157.346,119.554 ; D11.2@160.089,94.245 161.225,95.381 ; D11.2@160.551,95.105 ccw(c160.558,96.048) 161.225,95.381 ; D11.2@160.949,94.707 cw(c161.892,94.714) 161.225,95.381 ; v1(161.225,96.4) 161.225,95.381 ; D12.2@163.101,107.191 cw(c161.555,107.095) v1(162.65,106) 163.5,106.85 D12.2@163.5,107.865 ; 163.121,106.471 ccw(c162.441,107.15) D12.2@163.4,107.209
  Mid-Layer 2 w0.3: v1(128.025,105.4) 128.025,112.381 138.344,122.7 v1(146.225,122.7) 152.681,122.7 157.975,117.406 v1(157.975,117.3) 158,117.3 162.65,112.65 v1(162.65,106) 162.65,97.825 v1(161.225,96.4) 152.925,88.1 v1(145.175,88.1) 136.775,88.1 v1(135.575,89.3) ; 157.729,117.652 cw(c157.377,117.3) v1@157.875,117.3 ; v1@157.975,117.2 cw(c157.975,116.898) 158.188,117.112
  Bottom Layer w0.3: R17.2@144.579,87.035 ccw(c143.926,88.1) v1(145.175,88.1) ; R17.2@144.735,86.779 ccw(c144.254,87.564) 145.175,87.564 ; R17.2@144.825,86.225 145.175,86.575 v1(145.175,88.1) ; 145.175,87.438 ccw(c146.138,87.438) R17.2@145.503,86.714 ; R17.2@145.701,86.94 cw(c146.718,88.1) v1(145.175,88.1)
  other v1: 132.825,117.181
GND: C2.2 C7.2 C11.2 C29.2 C30.2 C32.2 CT1.2 D1.1 D2.1 D3.1 D4.4 GND.1 P1.1 Q1.2 Q6.2 R11.1 R17.1 R18.1 R25.1 R34.1 U1.2 U1.3 U1.6 U1.9 U2.11 U4.2 | length 125.8
  Top Layer w0.3: v1@139.1,113.9 C7.2@139.673,113.327 ; C7.2@139.675,113.25 139.675,114.525 140.75,115.6 144.55,115.6 146.075,115.6 v1(146.475,115.2) ; U2.11@144.453,110.695 144.453,111.653 ; U2.11@144.453,114.105 144.453,113.148 ; 144.956,111.644 cw(c145.212,111.9) U2.11@144.85,111.9 ; 144.956,113.156 ccw(c145.212,112.9) U2.11@144.85,112.9 ; U2.11@144.961,110.695 144.961,111.64 U2.11@144.7,111.9 ; 144.961,113.167 cw(c144.583,113.167) U2.11@144.85,112.9 ; 144.961,115.5 U2.11@144.961,114.105 144.961,113.161 ; D3.1@149.889,99.099 ccw(c149.275,98.829) v1(149.275,99.5) ; D3.1@149.889,99.901 cw(c149.275,100.171) v1(149.275,99.5) ; D3.1@150.925,99.5 v1(149.275,99.5) ; D2.1@151.675,110.4 152.575,109.5 v1(153.275,109.5) ; 144.453,111.653 ccw(c144.217,111.888) U2.11@144.55,111.9 ; 144.453,111.653 U2.11@144.7,111.9 ; 144.453,113.147 cw(c144.217,112.912) U2.11@144.55,112.9 ; 144.453,113.148 U2.11@144.7,112.9 ; U2.11@144.55,111.9 ccw(c144.785,111.665) 144.453,111.665 cw(c144.785,111.665) U2.11@144.55,111.9 ; U2.11@144.55,112.9 cw(c144.785,113.135) 144.453,113.135 ccw(c144.785,113.135) U2.11@144.55,112.9 ; U2.11@144.7,111.9 U2.11@144.7,112.9 ; U2.11@144.7,112.9 144.961,113.161 ; U2.11@144.85,111.9 cw(c144.583,111.633) 144.961,111.633 ccw(c144.583,111.633) U2.11@144.85,111.9 ; U2.11@144.85,112.9 ccw(c144.598,113.16) 144.961,113.16
  Bottom Layer w0.3: D4.4@125.193,106.811 ccw(c124.35,106.092) v1(124.35,107.2) ; D4.4@125.193,107.589 cw(c124.35,108.308) v1(124.35,107.2) ; D4.4@125.65,107.2 v1(124.35,107.2) ; U4.2@132.1,112.6 v1(133.2,112.6) ; U4.2@132.638,112.512 cw(c132.852,112.298) 132.852,112.6 cw(c132.852,112.902) U4.2@132.638,112.688 ; C29.2@133.95,109.825 134.775,109.825 v1(134.8,109.85) ; C29.2@134.212,109.613 cw(c134.724,109.101) 134.724,109.825 cw(c134.724,110.549) C29.2@134.212,110.037 ; 134.453,109.898 ccw(c134.555,110.275) v1@134.75,109.937 ; 134.498,109.825 ccw(c134.498,110.152) v1@134.729,109.921 ; 134.557,109.78 ccw(c134.491,110.028) v1@134.713,109.9 ; D1.1@135.287,99.601 cw(c134.945,98.9) v1(135.725,98.9) ; D1.1@135.725,100.5 v1(135.725,98.9) ; D1.1@136.163,99.601 ccw(c136.505,98.9) v1(135.725,98.9) ; R34.1@137.513,117.963 cw(c137.001,117.451) 137.725,117.451 cw(c138.449,117.451) R34.1@137.937,117.963 ; 137.725,117.688 ccw(c137.989,117.688) v1@137.802,117.501 ; R34.1@137.725,118.225 137.725,117.424 v1(137.732,117.431) ; 137.79,117.694 ccw(c138.062,117.621) v1@137.818,117.481 ; C30.2@137.913,111.812 ccw(c137.401,112.324) 138.125,112.324 ccw(c138.849,112.324) C30.2@138.337,111.812 ; C32.2@137.913,113.388 cw(c137.401,112.876) 138.125,112.876 cw(c138.849,112.876) C32.2@138.337,113.388 ; C30.2@138.125,111.6 138.125,113.55 C32.2@138.075,113.6 138.075,113.875 138.1,113.9 v1(139.05,113.9) ccw(c139.05,113.187) C32.2@138.399,113.478 ; C32.2@138.125,113.6 cw(c138.587,113.394) 138.587,113.9 ; CT1.2@138.315,105.488 cw(c138.315,104.011) 139.36,105.055 cw(c140.404,106.1) CT1.2@138.927,106.1 ; CT1.2@138.315,106.1 140.094,104.321 C2.2@140.094,102.302 ; C2.2@139.527,102.869 ccw(c138.157,104.239) 140.094,104.239 ccw(c142.031,104.239) C2.2@140.661,102.869 ; C2.2@139.739,102.657 ccw(c138.881,103.515) 140.094,103.515 ccw(c141.307,103.515) C2.2@140.449,102.657 ; R25.1@140.328,91.497 ccw(c138.646,93.179) 141.025,93.179 ; R25.1@140.54,91.285 ccw(c139.37,92.455) 141.025,92.455 ; R11.1@140.813,93.613 cw(c140.301,93.101) 141.025,93.101 cw(c141.749,93.101) R11.1@141.237,93.613 ; R25.1@141.025,90.9 R11.1@141.025,93.825 ; R25.1@141.025,91.025 v1(142.775,91.025) ; 141.025,92.334 ccw(c142.509,92.334) R25.1@141.46,91.285 ; 141.025,93.058 ccw(c143.233,93.058) R25.1@141.672,91.497 ; R25.1@141.593,90.559 cw(c142.312,90.238) 142.312,91.025 ; R25.1@141.681,91.487 ccw(c142.775,92.55) v1(142.775,91.025) ; R25.1@141.867,90.437 cw(c142.775,90.03) v1(142.775,91.025) ; 143.245,91.025 cw(c143.245,90.209) R17.1@143.985,90.552 ; R17.1@143.713,90.426 ccw(c142.775,89.991) v1(142.775,91.025) ; R17.1@143.9,91.494 cw(c142.775,92.61) v1(142.775,91.025) ; R17.1@144.825,90.825 144.625,91.025 v1(142.775,91.025) ; R17.1@144.825,91.025 v1(146.875,91.025) ; GND.1@145.153,102.953 cw(c144.555,102.355) 145.4,102.355 cw(c146.245,102.355) GND.1@145.647,102.953 ; v1@145.313,102.35 ccw(c145.062,102.495) 145.342,102.57 ; v1(145.4,102.3) GND.1@145.4,103.7 ; 145.458,102.57 ccw(c145.738,102.495) v1@145.487,102.35 ; R17.1@145.665,90.552 cw(c146.405,90.209) 146.405,91.025 ; R17.1@145.75,91.494 ccw(c146.875,92.61) v1(146.875,91.025) ; R17.1@145.937,90.426 cw(c146.875,89.991) v1(146.875,91.025) ; 147.342,91.025 cw(c147.342,90.264) R18.1@148.034,90.58 ; R18.1@147.6,91.05 147.575,91.025 v1(146.875,91.025) ; R18.1@147.761,90.456 ccw(c146.875,90.051) v1(146.875,91.025) ; R18.1@147.922,91.488 cw(c146.875,92.438) v1(146.875,91.025) ; v1@153.5,96.475 cw(c153.5,96.173) 153.713,96.387 ; v1(153.5,96.575) 153.5,96.6 C11.2@154.25,95.85 ; v1@153.597,96.601 ccw(c153.942,96.694) 153.763,96.383 ; v1@153.653,96.447 ccw(c154.25,97.045) C11.2@154.25,96.2 ; 153.773,96.327 cw(c153.346,95.9) C11.2@153.95,95.9 ; v1@155.199,99.197 ccw(c155.119,99.495) Q6.2@155.387,99.341 ; v1(155.225,99.1) 155.225,99.125 155.827,99.727 Q6.2@155.827,99.891 ; v1@155.278,99.178 cw(c155.827,98.628) Q6.2@155.827,99.406 ; v1@155.313,99.213 ccw(c154.814,99.713) Q6.2@155.52,99.713 ; v1@155.322,99.074 cw(c155.69,98.975) Q6.2@155.499,99.306 ; v1@155.325,99.1 cw(c155.627,99.1) Q6.2@155.413,99.313 ; v1@161.963,110.787 Q1.2@163.05,109.7 ; v1@162.075,110.8 ccw(c162.377,110.8) 162.163,110.587 ; 162.495,110.255 cw(c161.94,109.7) Q1.2@162.725,109.7 ; 162.556,110.194 ccw(c163.025,110.664) Q1.2@163.025,110
  Bottom Layer w0.6: U1.6@131.325,92.86 ccw(c131.861,93.169) 131.701,92.572 ; 131.994,92.86 cw(c131.994,90.842) U1.9@133.478,92.209 ; U1.9@132.757,92.86 ccw(c132.757,93.593) U1.9@133.275,93.075 ; U1.9@133.037,91.803 ccw(c130.625,89.581) U1.6@130.625,92.86 132.99,92.86 v1(133.24,93.11) ; U1.9@133.205,93.075 ccw(c133.723,93.593) U1.9@133.723,92.86 ; U1.9@133.772,92.209 cw(c135.256,90.842) 135.256,92.86 ; U1.9@133.772,94.781 ccw(c135.256,96.148) 135.256,94.13 ; U1.9@133.828,93.754 cw(c134.26,93.694) U1.9@134.26,94.13 ; U1.9@133.842,93.783 cw(c134.68,92.945) U1.9@134.68,94.13 ; U1.9@134.213,91.803 cw(c136.625,89.581) U1.3@136.625,92.86 133.49,92.86 v1(133.24,93.11) ; U1.9@134.213,95.187 ccw(c136.625,97.409) U1.2@136.625,94.13 U1.9@134.26,94.13 ; v1(133.24,93.11) U1.9@133.625,93.495 v1(133.878,93.748) U1.9@134.26,94.13
  other v1: 147.625,83.3 143.45,83.6 161.075,90.2 161.975,110.8 135.45,124.8 150.3,126.5
GREEN: D8.5 D9.5 D10.5 D11.5 D12.5 D13.5 D14.5 D15.5 Q4.3 | length 143.2
  Top Layer w0.3: D8.5@126.917,106.933 cw(c126.234,106.25) 127.2,106.25 cw(c128.166,106.25) D8.5@127.483,106.933 ; v1@127.113,106.05 ccw(c126.713,106.281) 127.16,106.401 ; v1(127.2,106) D8.5@127.2,107.865 ; 127.24,106.401 ccw(c127.687,106.281) v1@127.287,106.05 ; v1(129,95.9) D9.5@130.108,94.792 ; 129.511,95.389 cw(c128.796,94.674) D9.5@129.807,94.674 ; 129.557,95.343 ccw(c130.207,95.994) D9.5@130.207,95.074 ; v1@133.282,118.782 cw(c133.879,118.184) D15.5@133.879,119.029 ; v1@133.297,118.674 cw(c133.629,118.585) 133.457,118.883 ; D15.5@133.48,119.414 cw(c132.523,119.377) v1(133.2,118.7) 134.339,119.839 D15.5@134.339,119.889 ; v1(138.575,87.3) D10.5@142.81,87.3 ; 141.134,87.3 ccw(c141.134,88.351) D10.5@141.877,87.608 ; 141.254,87.3 cw(c141.254,86.42) D10.5@141.877,87.042 ; v1(146.25,123.5) 146.275,123.475 D14.5@147.965,123.475 ; v1@146.3,123.587 ccw(c146.506,123.943) 146.613,123.545 ; v1@146.321,123.571 ccw(c146.552,123.802) 146.552,123.475 ; D14.5@147.033,123.192 ccw(c146.35,122.509) 146.35,123.475 ccw(c146.35,124.441) D14.5@147.033,123.758 ; D11.5@156.461,90.617 157.625,91.781 v1(157.625,91.8) ; D11.5@156.921,91.477 ccw(c156.921,92.442) 157.603,91.76 ccw(c158.286,91.077) D11.5@157.321,91.077 ; 157.377,91.629 ccw(c157.215,91.91) v1@157.528,91.826 ; 157.441,91.597 ccw(c157.238,91.8) v1@157.525,91.8 ; v1@158.874,117.503 cw(c158.788,117.184) 159.075,117.349 ; v1(158.9,117.6) D13.5@160.114,116.386 ; v1@158.997,117.626 ccw(c159.316,117.712) 159.151,117.425 ; D13.5@159.254,116.846 ccw(c158.289,116.846) 158.972,117.528 ccw(c159.654,118.211) D13.5@159.654,117.246 ; D12.5@163.217,103.668 ccw(c162.535,104.35) v1@163.5,104.35 ; v1@163.363,104.35 cw(c162.973,104.125) 163.408,104.008 ; v1@163.379,104.329 cw(c163.088,104.038) 163.5,104.038 ; v1@163.4,104.313 cw(c163.219,104) 163.569,104.094 ; v1(163.45,104.4) v1@163.5,104.35 ; D12.5@163.5,102.735 v1@163.5,104.35 ; D12.5@163.783,103.668 cw(c164.465,104.35) v1@163.5,104.35
  Mid-Layer 2 w0.3: 127.2,97.675 v1@128.987,95.887 ; 127.2,97.681 v1(127.2,106) 127.2,112.7 v1(133.2,118.7) 138,123.5 v1(146.25,123.5) 153,123.5 v1(158.9,117.6) 163.45,113.05 v1(163.45,104.4) 163.45,97.625 v1(157.625,91.8) 153.125,87.3 v1(138.575,87.3) ; 128.787,96.088 ccw(c129,96.302) v1@129,96
  Bottom Layer w0.6: v1(158.9,117.6) 160.025,118.725 Q4.3@160.025,119.45 ; 159.214,117.914 ccw(c157.677,119.45) Q4.3@159.85,119.45
INPUT: Q1.3 R1.1 U2.6 | length 20
  Top Layer w0.2: U2.6@146.437,111.393 147.832,111.393 148.025,111.2 149.25,111.2 150.25,112.2 v1(155,112.2) ; v1@154.894,112.094 ccw(c154.638,111.838) 154.638,112.2 ccw(c154.638,112.562) v1@154.894,112.306
  Bottom Layer w0.254: v1@155,112.077 cw(c155,111.78) 155.21,111.99 cw(c155.42,112.2) v1@155.123,112.2 ; v1(155,112.2) 156.5,110.7 R1.1@158.475,110.7 158.525,110.65 Q1.3@160.55,110.65 ; R1.1@158.247,110.472 ccw(c157.695,109.92) 157.695,110.7 ccw(c157.695,111.48) R1.1@158.247,110.928 ; R1.1@158.703,110.422 cw(c159.255,109.87) 159.255,110.65 cw(c159.255,111.43) R1.1@158.703,110.878 ; Q1.3@160.297,110.422 ccw(c159.745,109.87) 159.745,110.65 ccw(c159.745,111.43) Q1.3@160.297,110.878
LED_B: R21.2 R22.2 U2.4 | length 26.3
  Top Layer w0.2: U2.4@142.963,111.893 142.018,111.893 141.75,111.625 141.75,109.4 142.25,108.9 149.475,108.9 ; 148.83,108.9 ccw(c148.83,109.945) v1@149.569,109.206 ; 149.313,108.9 ccw(c149.313,109.462) v1@149.71,109.065 ; v1@149.528,109.072 cw(c149.339,109.036) 149.475,108.9 ; v1@149.647,108.953 ccw(c149.611,108.764) 149.475,108.9 ; v1(149.675,109.1) 149.475,108.9
  Bottom Layer w0.2: v1(149.675,109.1) 149.925,109.35 149.925,110.25 154.025,114.35 R21.2@154.075,114.35 154.025,114.4 R22.2@154.025,116.15 ; R21.2@153.675,114.35 cw(c152.83,114.35) 153.428,113.753 cw(c154.025,113.155) R21.2@154.025,114 ; R21.2@153.778,114.597 ccw(c153.18,115.195) 154.025,115.195 ccw(c154.87,115.195) R21.2@154.272,114.597 ; R22.2@153.778,115.903 cw(c153.18,115.305) 154.025,115.305 cw(c154.87,115.305) R22.2@154.272,115.903